# EAGLE board velocity Sensor (EAGLE 9.7.0)

Size 152.18 x 77.68 mm. Coordinates in mm from the lower left corner, seen from the top.
Outline: 0,0 152.18,0 152.18,77.68 0,77.68 0,0
Copper layers (1*16): Top 0.035mm / dielectric 1.5mm / Bottom 0.035mm
Design rules "default": minimum track width 6mil, minimum drill 0.35mm, track to track 6mil, track to pad 6mil, pad to pad 6mil, via to via 6mil, smd to smd 6mil, copper to edge 40mil, drill to drill 6mil, minimum pad ring 10mil, minimum via ring 8mil, stop-mask expansion 4mil, vias tented up to drill 0mil, thermal gap 10mil

## Footprints (pad centres in the part's own frame; a part is rotated, then mirrored left to right if it is on the bottom)
LEDRD254W60D565H860B = drill 0.981 pad 1.581: 1 -1.27,0; 2 1.27,0
MOTOR = drill 1.118 pad 3.15 octagon: + 2.54,0; - -2.54,0
HA-06-SM065 = drill 1 pad 1.676: 1 -2.54,-2.54; 2 0,2.54; 3 2.54,-2.54
RESAD1016W63L850D250B = drill 0.83 pad 1.43: 1 -5.08,0; 2 5.08,0
ARDUINO-UNO-R3-SHIELD = drill 1.016 pad 1.88: 3.3V 24.13,-2.54; 5V 24.13,0; A0 24.13,12.7; A1 24.13,15.24; A2 24.13,17.78; A3 24.13,20.32; A4 24.13,22.86; A5 24.13,25.4; AREF -24.13,-13.97; D2 -24.13,20.32; D3 -24.13,17.78; D4 -24.13,15.24; D5 -24.13,12.7; D6 -24.13,10.16; D7 -24.13,7.62; D8 -24.13,3.81; D9 -24.13,1.27; D10 -24.13,-1.27; D11 -24.13,-3.81; D12 -24.13,-6.35; D13 -24.13,-8.89; GND@0 24.13,2.54; GND@1 24.13,5.08; GND@2 -24.13,-11.43; IOREF 24.13,-7.62; NC 24.13,-10.16; RES 24.13,-5.08; RX -24.13,25.4; SCL -24.13,-19.05; SDA -24.13,-16.51; TX -24.13,22.86; VIN 24.13,7.62

## Placement (x,y rotation side)
D1  RED  [LEDRD254W60D565H860B]  109.57,51.58 180 top
M1  MOTOR_HDR  [MOTOR]  143.93,69.42 0 top
RPOT1  2k  [HA-06-SM065]  121,51.58 0 top
RR1  220  [RESAD1016W63L850D250B]  108.3,38.88 90 top
UARDUINO_UNO_R3  ARDUINO-UNO-R3-SHIELD  [ARDUINO-UNO-R3-SHIELD]  47.88,29.84 270 top

## Library data of the parts
D1 = Tinkercad; CATEGORY: Opto-Electronic; SUB-CATEGORY: LED; VALUE: LED_RED
M1 RPOT1 RR1 UARDUINO_UNO_R3 = Tinkercad

## Nets
D1_C: D1.2 RR1.2
UARDUINO_UNO_R3_3.3V: RPOT1.3 UARDUINO_UNO_R3.3.3V
UARDUINO_UNO_R3_A0: RPOT1.2 UARDUINO_UNO_R3.A0
UARDUINO_UNO_R3_D3: D1.1 M1.+ UARDUINO_UNO_R3.D3
UARDUINO_UNO_R3_GND: M1.- RPOT1.1 RR1.1 UARDUINO_UNO_R3.GND@0 UARDUINO_UNO_R3.GND@1 UARDUINO_UNO_R3.GND@2

## Tracks (layer width: path | path; a pad name or v marks a point on that pad's centre or on a via)
D1_C  (1 unrouted)
UARDUINO_UNO_R3_3.3V  (1 unrouted)
UARDUINO_UNO_R3_A0  (1 unrouted)
UARDUINO_UNO_R3_D3  (2 unrouted)
UARDUINO_UNO_R3_GND  (5 unrouted)